# Altium PCB Opto (el que tenemos).PcbDoc
Units mm, origin at the board's own origin, x right, y up, seen from the top; angles counter-clockwise.
Board outline 32.51 x 12.32 mm, 2 copper layers (Top Layer, Bottom Layer); 4 components, 0 nets, 15 pads, 0 vias.
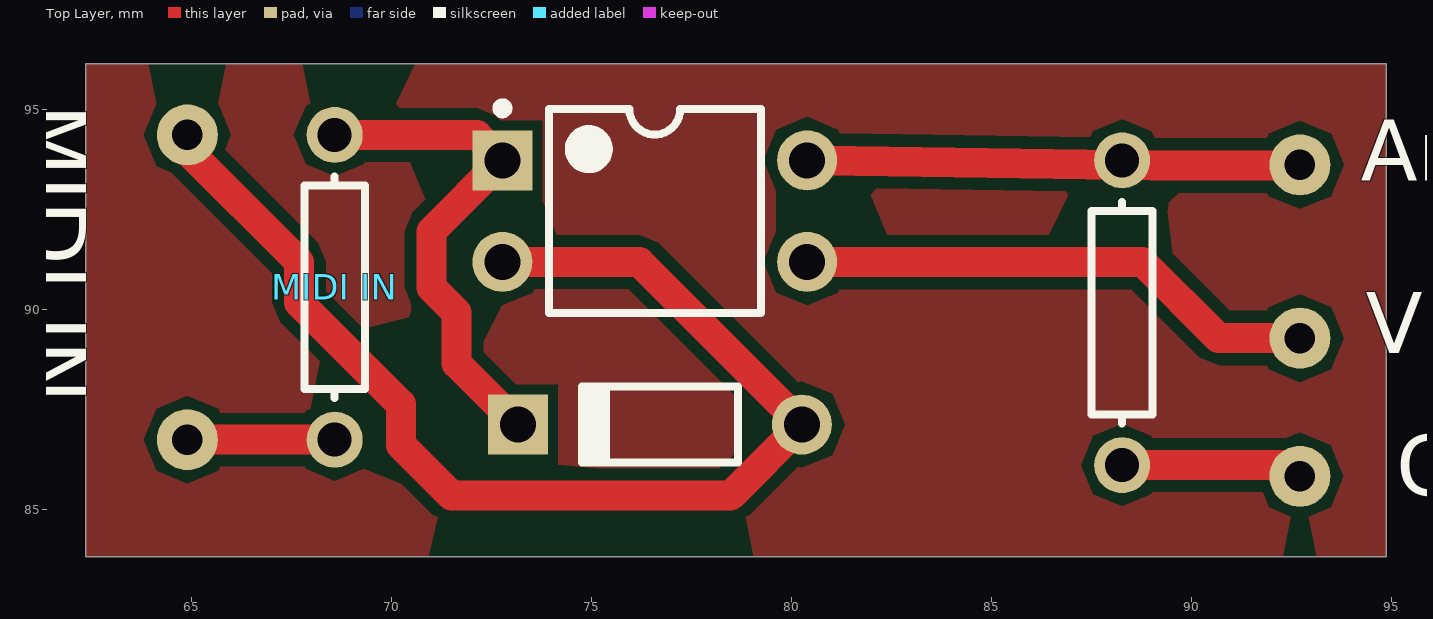
[diagram p0: Top Layer view]
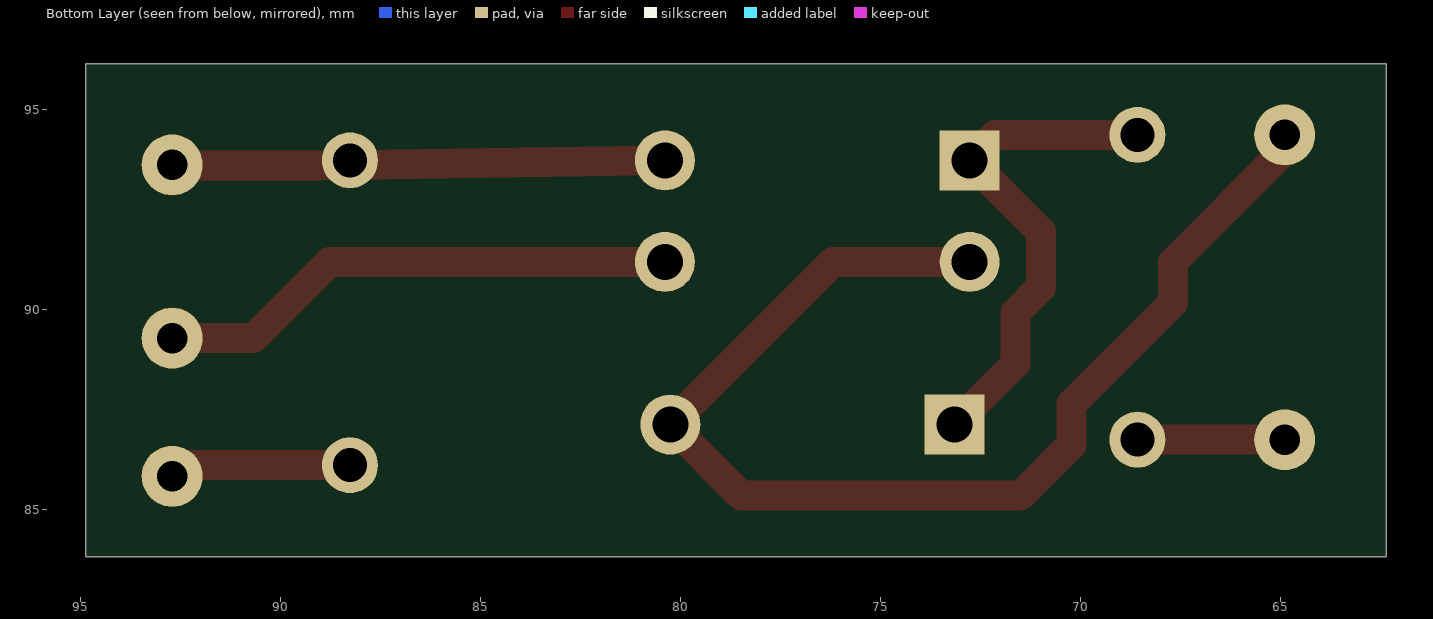
[diagram p1: Bottom Layer view, seen from below]

## Layer stack, top to bottom
Top Solder: solder mask 0.0102, Solder Resist, Dk 3.5
Top Layer: signal copper 0.0356
Dielectric 1: dielectric 0.32, FR-4, Dk 4.8
Bottom Layer: signal copper 0.0356
Bottom Solder: solder mask 0.0102, Solder Resist, Dk 3.5

## Board outline
62.357,83.82 94.869,83.82 94.869,96.139 62.357,96.139

## Design rules (kind name [scope] priority, off if disabled: settings)
Clearance [All] p1: gap=0.254
PolygonConnect [All] p1: connectstyle=Relief reliefconductorwidth=0.254 reliefentries=4 polygonreliefangle="90 Angle" airgapwidth=0.254
RoutingVias [All] p1: holewidth=0.711 width=1.27 viastyle="Through Hole" minholewidth=0.711 minwidth=1.27 maxholewidth=0.711 maxwidth=1.27
SolderMaskExpansion [All] p1: expansion=0.102
Width [All] p1: maxlimit=0.75 minlimit=0.75 preferedwidth=0.75
30 further rules are at their usual default settings.

## Components (designator, comment, footprint, x,y, rotation, side; value= is the part's Value field where it differs from the comment)
Arduino "Comment" DIP-4 76.581,92.456 r0 top
GND "Comment" AXIAL-0.3 88.265,89.916 r270 top
"MIDI IN" "Comment" AXIAL-0.3 68.58,90.551 r270 top
VCC "Comment" DO-35 76.708,87.122 r180 top

## Footprints (in the part's own frame and the unit in brackets; to place one, negate y for a bottom-side part, rotate by r counter-clockwise, add the part's x,y. Pads: shape width x height; smd on the part's side, far side on the other; paste and mask are expansions set on the pad)
AXIAL-0.3 [mm] "Axial Device, Thru-Hole; 2 Leads; 0.3 in Pin Spacing"
  round 1.4 hole 0.85: 1(-3.81,0) 2(3.81,0)
  silkscreen extent -2.77,-0.76 2.77,0.76
DIP-4 [mm] "DIP; 4 Leads; Row Spacing 7.62 mm; Pitch 2.54 mm"
  rect 1.5x1.5 hole 0.9: 1(-3.81,1.27)
  round 1.5 hole 0.9: 2(-3.81,-1.27) 3(3.81,-1.27) 4(3.81,1.27)
  silkscreen extent -3.93,-2.55 2.65,2.69, body extent -3.15,-2.5 3.15,2.5, height 5.6
DO-35 [mm] "Diode, Axial; Body 3.8 x 1.9 mm (LxDia. max), Lead Dia. 0.53 mm (max)"
  round 1.5 hole 0.9: 1(-3.55,0)
  rect 1.5x1.5 hole 0.9: 2(3.55,0)
  silkscreen extent -1.95,-0.95 2.05,0.95

## Part data
Arduino: library part Optoisolator1
GND "MIDI IN": library part Res1
VCC: library part "Diode 1N4148"

## Free pads (board coordinates)
  round 1.524 hole 0.762: 0(64.897,86.741) 1(64.897,94.361) 2(92.71,89.281) 3(92.71,85.827) 4(92.71,93.611)

## Nets (pads, with @x,y where several pads share a name; then routed paths per layer and width w, separated by ;. In a path a pad name is that pad's centre, name@x,y a point inside that pad or via, vN(x,y) a via of type N, cw(c..) or ccw(c..) an arc to the next point about the centre after c; other vN are vias at no path point)
pads on no net: "MIDI IN.1" "MIDI IN.2" Arduino.1 Arduino.2 Arduino.3 Arduino.4 GND.1 GND.2 VCC.1 VCC.2
copper on no net: | length 78.6
  Top Layer w0.254: 64.897,93.98 64.897,94.361 ; 68.453,86.614 68.58,86.741 ; 72.612,93.885 72.771,93.726 ; 73.152,87.122 73.158,87.122 ; 92.202,86.233 92.71,85.827 ; 92.71,89.281 92.964,89.027
  Top Layer w0.75: 64.897,86.741 68.58,86.741 ; 64.897,93.98 67.691,91.186 67.691,90.17 70.231,87.63 70.231,86.614 71.501,85.344 78.48,85.344 80.258,87.122 76.194,91.186 72.771,91.186 ; 68.58,94.361 72.136,94.361 72.612,93.885 ; 72.771,93.726 70.993,91.948 70.993,90.551 71.628,89.916 71.628,88.646 73.152,87.122 ; 80.772,91.186 88.773,91.186 90.678,89.281 92.71,89.281 ; 80.772,93.726 89.027,93.599 93.091,93.599 ; 88.392,86.36 88.138,86.106 92.456,86.106 92.837,85.725 ; 92.583,89.027 92.964,89.027

## Polygon pours and split planes (outlines as drawn)
no net on Top Layer "Top Layer-No Net" (solid, pour order 0): 62.357,96.139 62.357,83.82 94.869,83.82 94.869,96.139